# EAGLE board Radio Console (EAGLE 7.2.0)
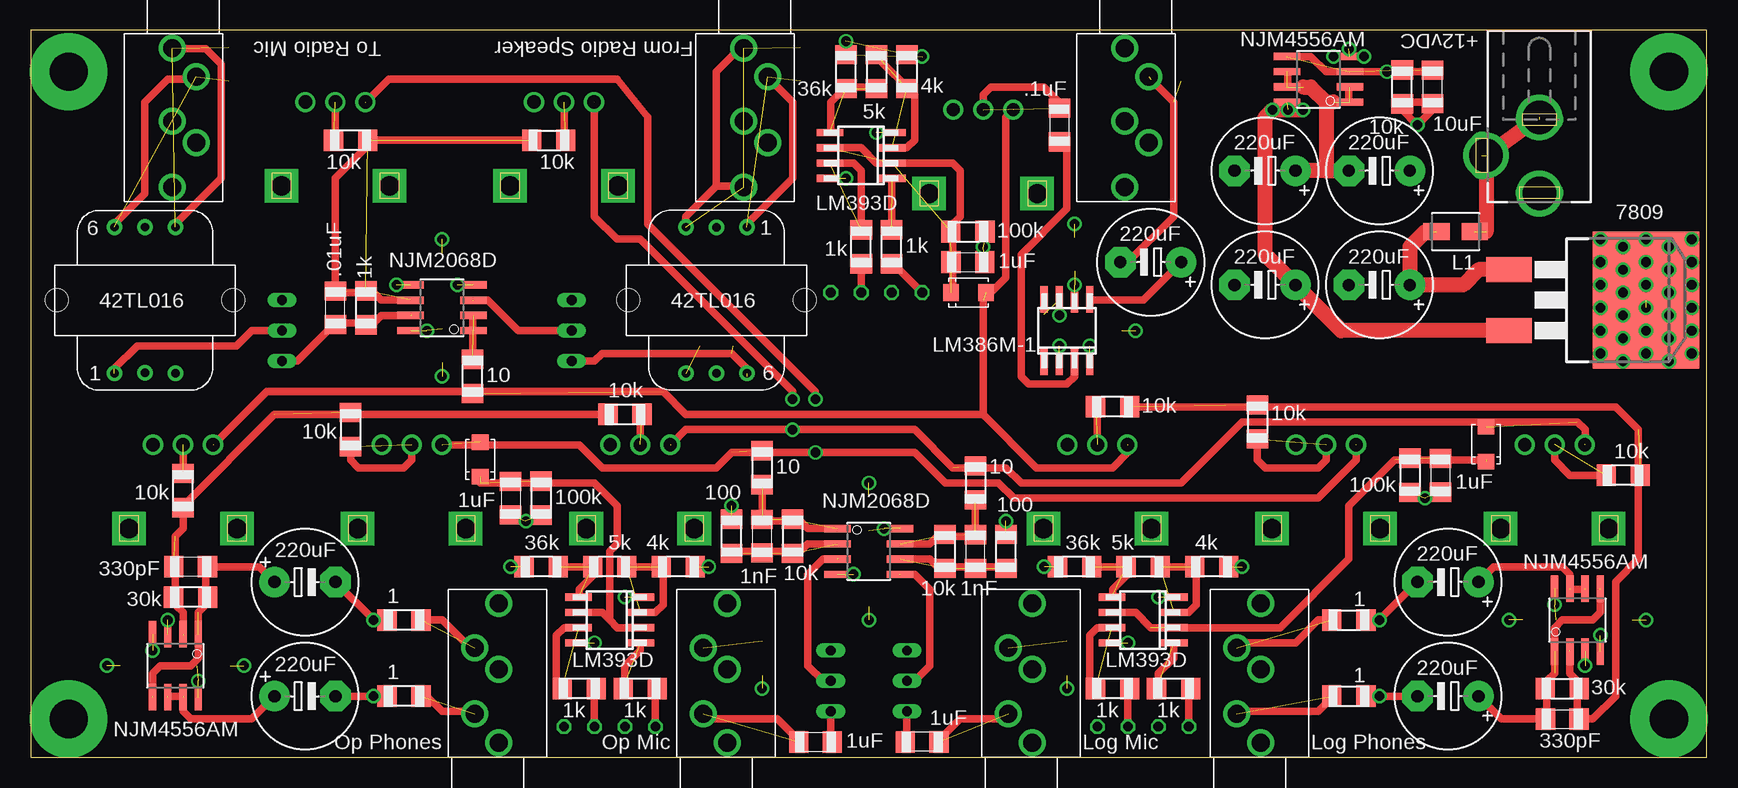
[diagram p0: board, top side]
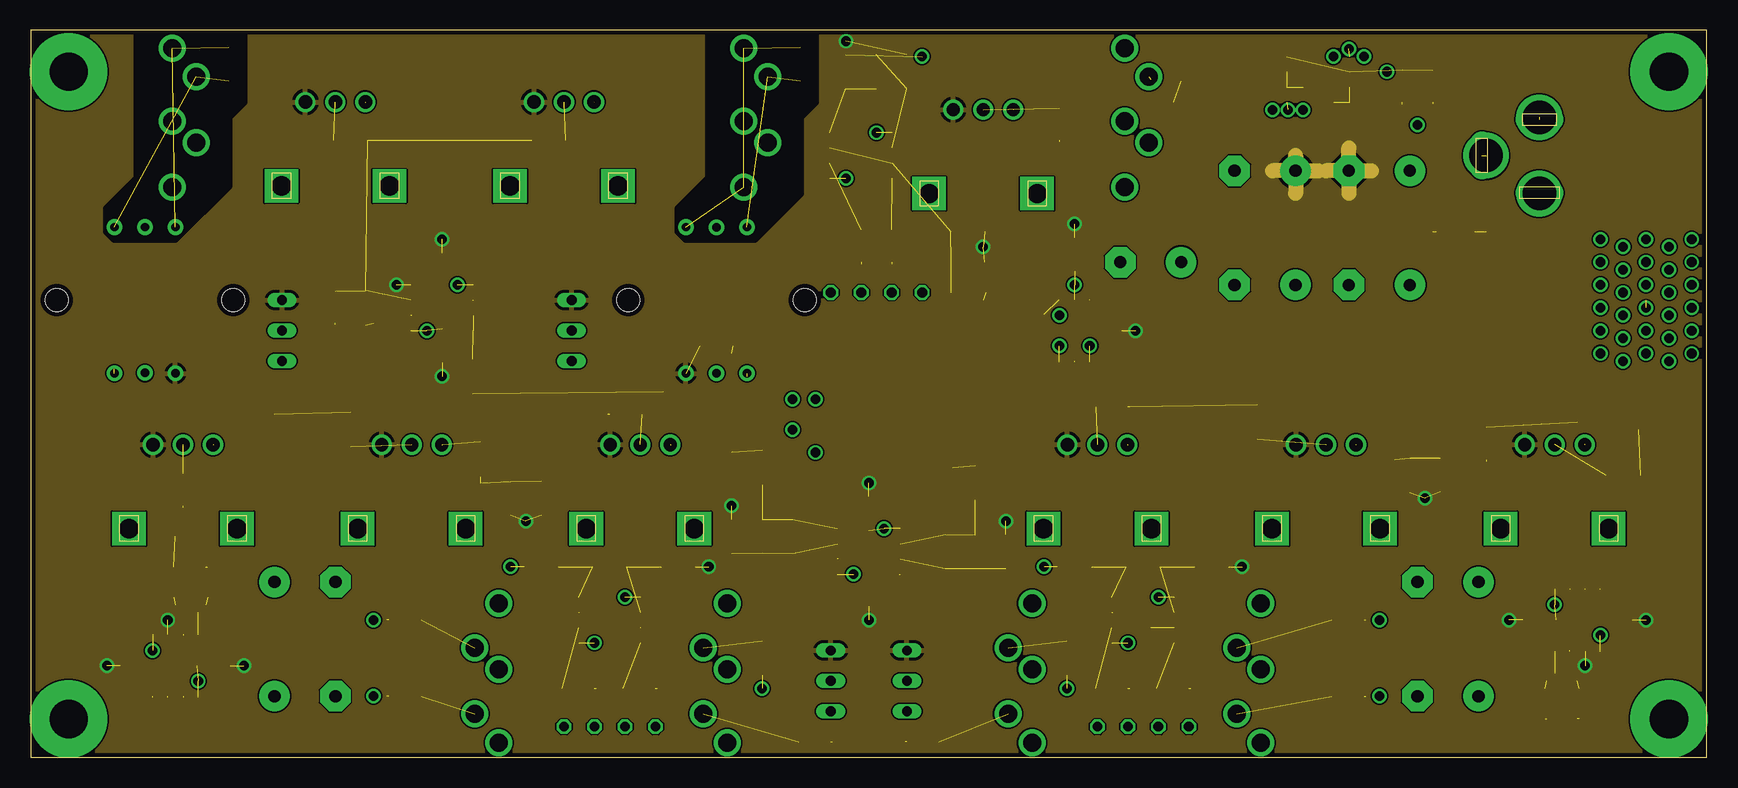
[diagram p1: board, inner layer VCC/2]
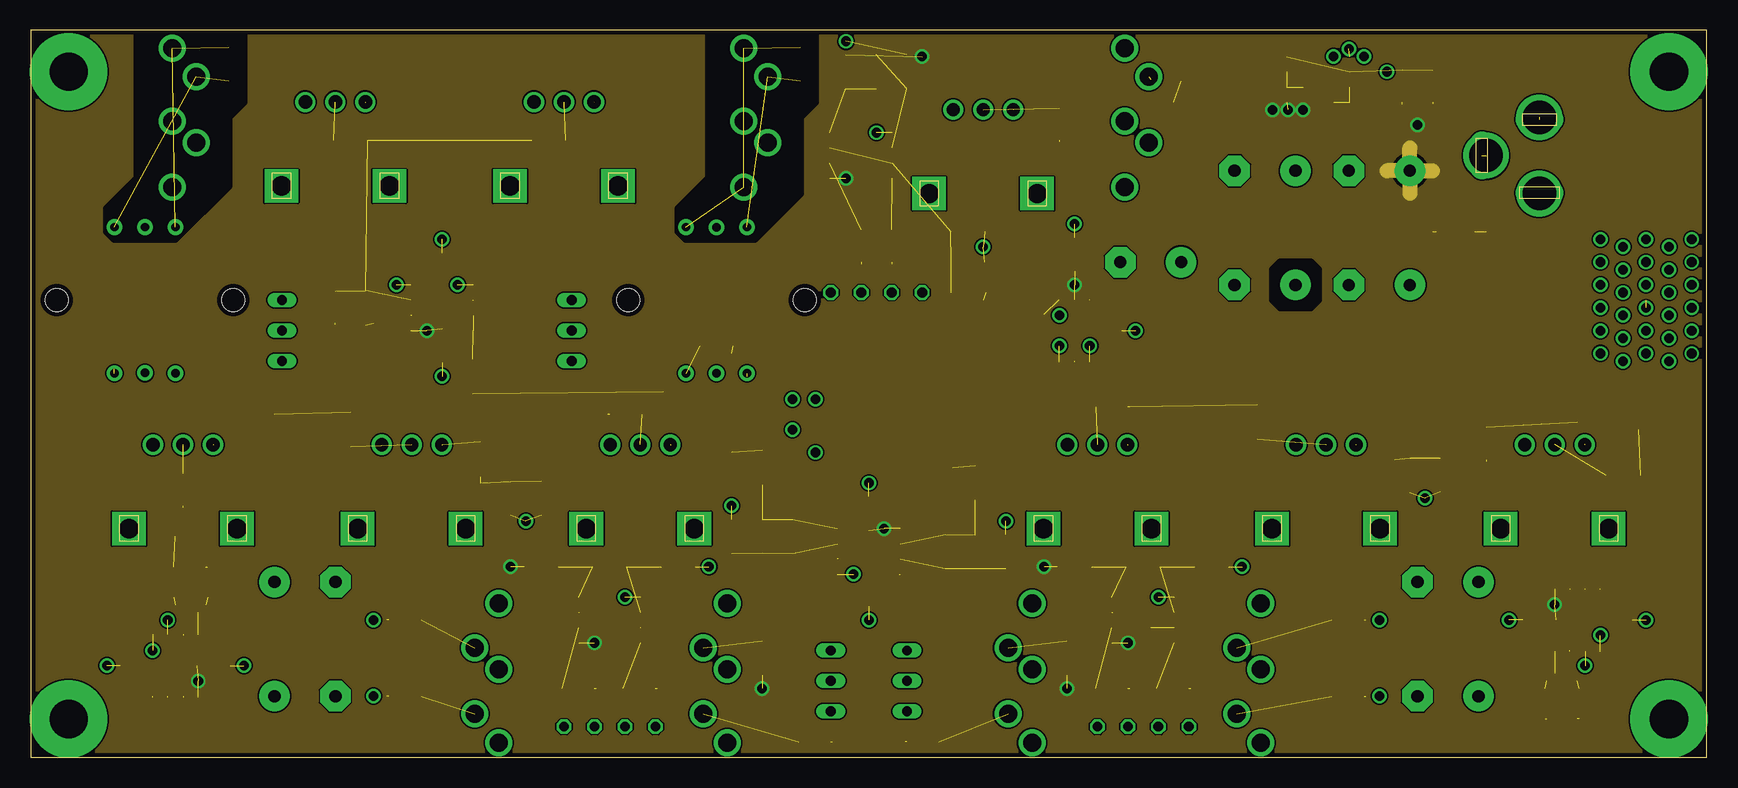
[diagram p2: board, inner layer VCC]
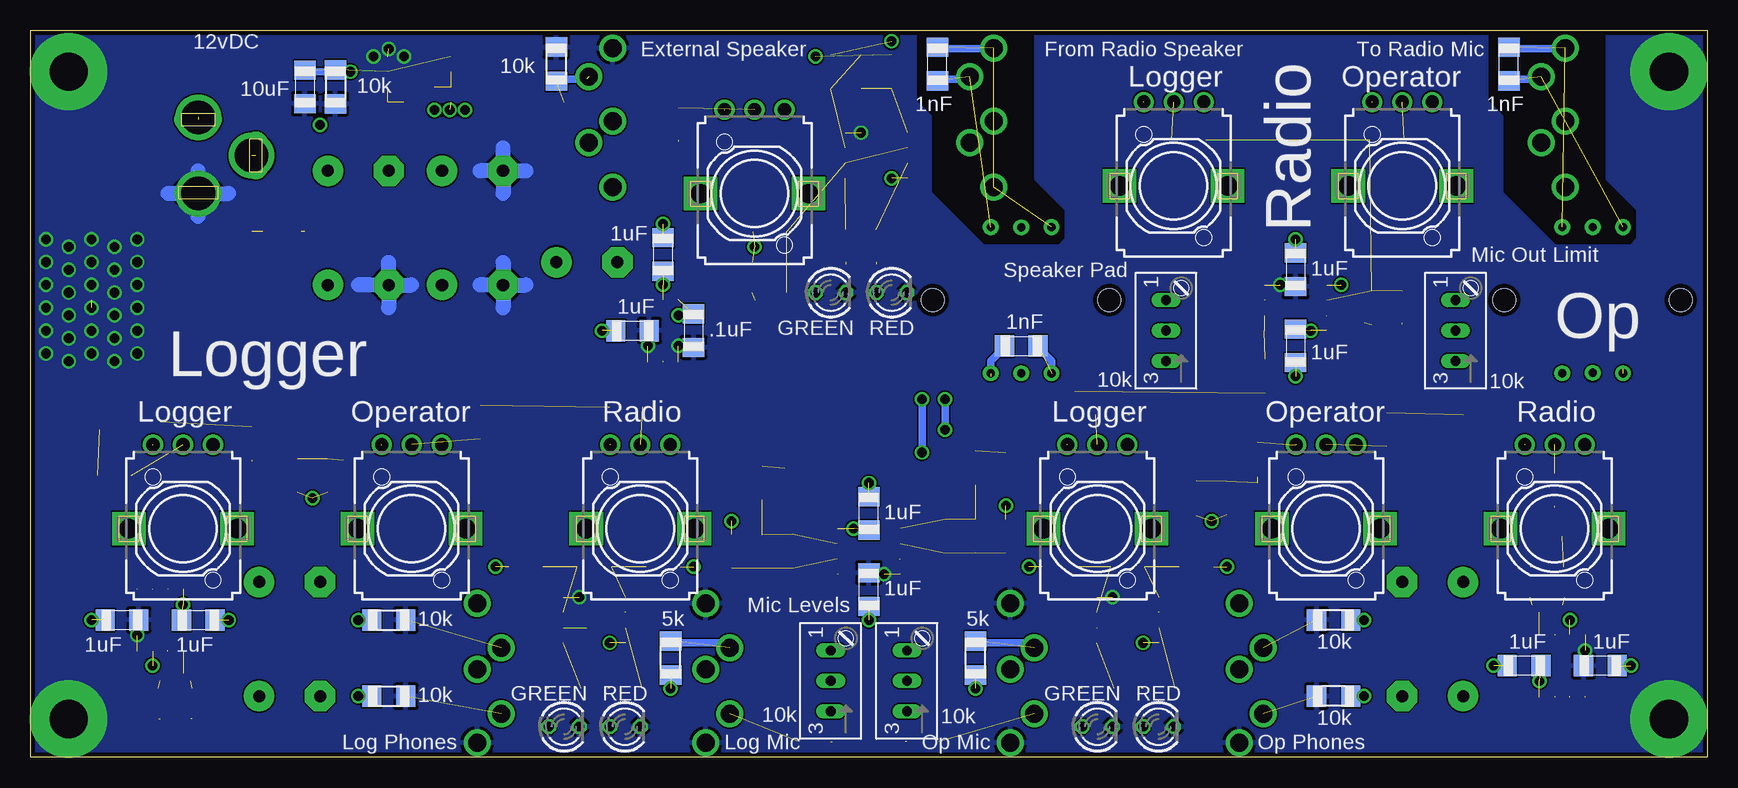
[diagram p3: board, bottom side, seen from below]

Size 139.68 x 60.63 mm. Coordinates in mm from the lower left corner, seen from the top.
Outline: 0,0 139.68,0 139.68,60.63 0,60.63 0,0
Copper layers (1*2*15*16): Top 0.035559375mm / dielectric 0.17018125mm / VCC/2 0.01778125mm / dielectric 47mil / VCC 0.01778125mm / dielectric 0.17018125mm / Bottom 0.035559375mm
Design rules "OSHPark-4layer": minimum track width 5mil, minimum drill 10mil, track to track 5mil, track to pad 5mil, pad to pad 5mil, via to via 5mil, smd to smd 5mil, copper to edge 15mil, drill to drill 6mil, minimum pad ring 4mil, minimum via ring 4mil, stop-mask expansion 4mil, vias tented up to drill 0mil, thermal gap 10mil

## Footprints (pad centres in the part's own frame; a part is rotated, then mirrored left to right if it is on the bottom)
C1206 = smd 1.6 x 1.8: 1 -1.4,0; 2 1.4,0
E5-8,5 = drill 1.016 pad 2.54: + -2.54,0 | drill 1.016 pad 2.54 octagon: - 2.54,0
SO08 = smd 0.61 x 2.21: 1 -1.905,-2.616; 2 -0.635,-2.616; 3 0.635,-2.616; 4 1.905,-2.616; 5 1.905,2.616; 6 0.635,2.616; 7 -0.635,2.616; 8 -1.905,2.616
SO08' = smd 0.6 x 2.2: 1 -1.905,-2.6; 2 -0.635,-2.6; 3 0.635,-2.6; 4 1.905,-2.6; 5 1.905,2.6; 6 0.635,2.6; 7 -0.635,2.6; 8 -1.905,2.6
SJ1-353 = drill 1.5: P$1 1.2,-0.9; P$2 3.6,1.1; P$3 9.1,1.1; P$4 12.8,-0.9; P$5 7.3,-0.9
DCJ0303 = drill 1 pad 2 long: 1 0,3.1; 2 4.8,0; 3 0,-3
L4035M = smd 2.2 x 1.4: 1 -1.6,0; 2 1.6,0
LED3MM = drill 0.813 octagon: A -1.27,0; K 1.27,0
R1206 = smd 1.6 x 1.803: 1 -1.422,0; 2 1.422,0
S64W = drill 0.813 long: A 2.54,1.27; E -2.54,1.27; S 0,1.27
EVUFXM = drill 1.1 pad 1.676: 1 -2.5,-7; 2 0,-7; 3 2.5,-7 | drill 1.6 pad 2.8 square: M1 4.5,0; M2 -4.5,0
42TL = drill 0.7 pad 1.3: 1 -2.54,-6.096; 2 0,-6.068; 3 2.54,-6.096; 4 2.54,6.096; 5 0,6.096; 6 -2.54,6.096 | hole 1.9: -7.353,0; 7.353,0
D2PACK = smd 2.083 x 3.81: 1 -2.54,-8.89; 3 2.54,-8.89 | smd 11.43 x 8.89: 2 0,2.54
DO-219AB = smd 1.3 x 1.4: ANODE -1.5,0; CATHODE 1.4,0

## Placement (x,y rotation side)
C1  1uF  [C1206]  74.3,1.27 180 top
C2  1nF  [C1206]  57.15,34.29 0 bottom
C3  1nF  [C1206]  78.74,17.14 90 top
C4  220uF  [E5-8,5]  118.11,5.08 180 top
C5  220uF  [E5-8,5]  118.11,14.61 180 top
C6  330pF  [C1206]  127.64,3.17 0 top
C7  .01uF  [C1206]  25.4,37.47 90 top
C8  220uF  [E5-8,5]  112.39,39.37 180 top
C9  10uF  [C1206]  116.84,55.88 90 top
C10  10uF  [C1206]  116.84,55.88 270 bottom
C11  220uF  [E5-8,5]  102.87,39.37 180 top
C12  1uF  [C1206]  34.29,34.29 270 bottom
C13  1uF  [C1206]  34.29,40.64 270 bottom
C14  1uF  [C1206]  15.24,7.62 180 bottom
C15  1uF  [C1206]  8.89,7.62 180 bottom
C16  1uF  [C1206]  69.85,20.32 90 bottom
C17  220uF  [E5-8,5]  22.86,14.61 0 top
C18  220uF  [E5-8,5]  22.86,5.08 0 top
C19  330pF  [C1206]  13.34,15.88 180 top
C20  1uF  [C1206]  65.41,1.27 0 top
C21  1uF  [C1206]  69.85,13.97 90 bottom
C22  1uF  [C1206]  125.73,11.43 0 bottom
C23  1uF  [C1206]  132.08,11.43 0 bottom
C24  1nF  [C1206]  60.96,18.41 90 top
C25  220uF  [E5-8,5]  102.87,48.9 180 top
C26  220uF  [E5-8,5]  112.39,48.9 180 top
C27  220uF  [E5-8,5]  93.34,41.27 180 top
C28  1uF  [C1206]  87,41.91 90 bottom
C29  .1uF  [C1206]  85.72,52.7 270 top
C30  1uF  [C1206]  89.53,35.56 0 bottom
C31  1nF  [C1206]  64.14,57.78 90 bottom
C32  1nF  [C1206]  16.51,57.78 90 bottom
C33  1uF  [C1206]  40.01,21.59 270 top
C34  1uF  [C1206]  78.11,41.27 0 top
C35  1uF  [C1206]  117.47,23.5 270 top
C36  .1uF  [C1206]  84.45,35.56 270 bottom
IC1  NJM4556AM  [SO08]  107.31,56.52 90 top
IC2  NJM4556AM  [SO08]  12.06,7.62 180 top
IC3  NJM4556AM  [SO08]  128.91,11.43 0 top
IC4  NJM2068D  [SO08]  69.85,17.14 270 top
IC5  NJM2068D  [SO08]  34.29,37.47 90 top
IC6  LM393D  [SO08']  48.26,11.43 90 top
IC7  LM393D  [SO08']  69.22,50.16 90 top
IC8  LM393D  [SO08']  92.71,11.43 90 top
IC10  LM386M-1  [SO08']  86.36,35.56 0 top
J1  Operator Headphones  [SJ1-353]  38.1,0 90 top
J2  Operator Microphone  [SJ1-353]  57.15,0 90 top
J3  To Radio MIcrophone  [SJ1-353]  12.7,60.33 270 top
J4  Logger Headphone  [SJ1-353]  101.6,0 90 top
J5  Logger Microphone  [SJ1-353]  82.55,0 90 top
J6  From Radio Speaker Out  [SJ1-353]  60.33,60.33 270 top
J7  [DCJ0303]  125.73,50.16 180 top
J8  Operator Headphones  [SJ1-353]  92.08,60.33 270 top
L1  [L4035M]  118.75,43.81 180 top
LED1  GREEN  [LED3MM]  50.8,2.54 0 bottom
LED2  RED  [LED3MM]  45.72,2.54 0 bottom
LED3  GREEN  [LED3MM]  73.03,38.73 0 bottom
LED4  RED  [LED3MM]  67.94,38.73 0 bottom
LED5  GREEN  [LED3MM]  95.25,2.54 0 bottom
LED6  RED  [LED3MM]  90.17,2.54 0 bottom
R1  5k  [R1206]  86.36,8.26 270 bottom
R2  10k  [S64W]  71.75,6.35 90 bottom
R3  10k  [R1206]  76.2,17.14 90 top
R4  100  [R1206]  81.28,17.14 270 top
R5  10  [R1206]  78.74,22.86 90 top
R6  EVU-F2AF30D14  [EVUFXM]  31.75,19.05 180 bottom
R7  10k  [R1206]  26.67,27.3 90 top
R8  EVU-F2AF30D14  [EVUFXM]  50.8,19.05 180 bottom
R9  10k  [R1206]  49.53,28.57 180 top
R10  EVU-F2AF30D14  [EVUFXM]  12.7,19.05 180 bottom
R11  10k  [R1206]  12.7,22.23 270 top
R12  1  [R1206]  31.11,11.43 0 top
R13  1  [R1206]  31.11,5.08 0 top
R14  30k  [R1206]  127.64,5.71 180 top
R15  10k  [R1206]  109.86,5.08 180 bottom
R16  10k  [R1206]  109.86,11.43 180 bottom
R17  EVU-F2AF30D14  [EVUFXM]  107.95,19.05 180 bottom
R18  10k  [R1206]  102.23,27.94 90 top
R19  EVU-F2AF30D14  [EVUFXM]  127,19.05 180 bottom
R20  10k  [R1206]  132.72,23.5 0 top
R21  EVU-F2AF30D14  [EVUFXM]  88.9,19.05 180 bottom
R22  10k  [R1206]  90.17,29.21 0 top
R23  1  [R1206]  109.86,5.08 180 top
R24  1  [R1206]  109.86,11.43 180 top
R25  30k  [R1206]  13.34,13.34 0 top
R26  10k  [R1206]  31.11,11.43 0 bottom
R27  10k  [R1206]  31.11,5.08 0 bottom
R28  5k  [R1206]  60.96,8.26 270 bottom
R29  10k  [S64W]  65.41,6.35 90 bottom
R30  10k  [R1206]  63.5,18.41 90 top
R31  100  [R1206]  58.42,18.41 270 top
R32  10k  [S64W]  43.81,35.56 90 bottom
R33  10  [R1206]  36.83,31.75 270 top
R34  10  [R1206]  60.96,24.13 90 top
R35  EVU-F2AF30D14  [EVUFXM]  25.4,47.62 180 bottom
R36  10k  [R1206]  26.67,51.44 0 top
R37  EVU-F2AF30D14  [EVUFXM]  44.45,47.62 180 bottom
R38  10k  [R1206]  43.18,51.44 180 top
R39  1k  [R1206]  27.94,37.47 270 top
R40  10k  [S64W]  19.68,35.56 90 bottom
R41  10k  [R1206]  114.3,55.88 270 top
R42  10k  [R1206]  114.3,55.88 90 bottom
R44  10k  [R1206]  95.89,57.78 270 bottom
R48  4k  [R1206]  53.98,15.88 0 top
R49  5k  [R1206]  48.26,15.88 0 top
R50  EVU-F2AF30D14  [EVUFXM]  79.38,46.99 180 bottom
R51  36k  [R1206]  42.55,15.88 0 top
R53  100k  [R1206]  42.55,21.59 90 top
R54  1k  [R1206]  50.8,5.71 0 top
R55  1k  [R1206]  45.72,5.71 0 top
R56  4k  [R1206]  73.03,57.15 90 top
R57  5k  [R1206]  70.48,57.15 90 top
R58  36k  [R1206]  67.94,57.15 270 top
R59  100k  [R1206]  78.11,43.81 180 top
R60  1k  [R1206]  71.75,42.55 270 top
R61  1k  [R1206]  69.22,42.55 270 top
R62  4k  [R1206]  98.42,15.88 0 top
R63  5k  [R1206]  92.71,15.88 0 top
R64  36k  [R1206]  87,15.88 0 top
R65  100k  [R1206]  114.94,23.5 90 top
R66  1k  [R1206]  95.25,5.71 0 top
R67  1k  [R1206]  90.17,5.71 0 top
TR1  42TL016  [42TL]  57.15,38.1 180 top
TR2  42TL016  [42TL]  9.53,38.1 0 top
U1  7809  [D2PACK]  132.08,38.1 270 top
U$1  RS07  [DO-219AB]  37.47,24.77 270 top
U$2  RS07  [DO-219AB]  78.11,38.73 180 top
U$3  RS07  [DO-219AB]  121.28,26.04 270 top

## Library data of the parts
C1-C36 L1 R1 R3-R5 R7 R9 R11-R16 R18 R20 R22-R28 R30 R31 R33 R34 R36 R38 R39 R41 R42 R44 R48 R49 R51 R53-R67 = resistor
IC1-IC5 = burr-brown; MF: TEXAS INSTRUMENT CONNECTORS; MPN: OPA2131UJ/2K5; OC_FARNELL: 1575488; OC_NEWARK: 75C4620
IC6-IC8 IC10 = linear
J1-J6 J8 = con-cui
J7 = con-jack; OC_FARNELL: unknown; OC_NEWARK: unknown
LED1-LED6 = led
R2 R6 R8 R10 R17 R19 R21 R29 R32 R35 R37 R40 R50 = pot
TR1 TR2 = trafo-xicon; OC_FARNELL: unknown; OC_NEWARK: unknown
U1 = v-reg
U$1-U$3 = diode

## Nets
GND: C8.- C10.2 C11.- C13.2 C15.2 C21.2 C23.2 C25.- C30.2 C36.2 IC1.4 IC2.4 IC3.4 IC4.4 IC5.4 IC6.4 IC7.4 IC8.4 IC10.2 IC10.4 J1.P$1 J2.P$1 J2.P$4 J4.P$1 J5.P$1 J5.P$4 J7.1 J8.P$1 LED1.K LED2.K LED3.K LED4.K LED5.K LED6.K R15.1 R16.1 R26.1 R27.1 R42.1 R44.1 U1.2
LOG-LOUT: J4.P$2 R23.2
LOG-MICRING: J5.P$3 R1.1
LOG-MICTIP: C1.1 J5.P$2
LOG-ROUT: J4.P$3 R24.2
LOGBUS: R5.2 R8.3 R19.3 R37.3 U$3.ANODE
N$1: C1.2 R2.E
N$2: IC4.5 R2.S
N$3: C3.1 IC4.6 R3.1 R4.2
N$4: C3.2 IC4.7 R3.2 R5.1
N$5: C2.1 R32.E TR1.6
N$6: R6.2 R7.1
N$7: R8.2 R9.1
N$8: R10.2 R11.1
N$9: C17.- R12.1 R26.2
N$10: C18.- R13.1 R27.2
N$11: C6.2 IC3.2 R14.1 R18.2 R20.2 R22.2
N$13: C19.2 IC2.2 R7.2 R9.2 R11.2 R25.1
N$15: R17.2 R18.1
N$16: R19.2 R20.1
N$17: C20.2 R29.E
N$18: R21.2 R22.1
N$19: C4.- R15.2 R23.1
N$20: C5.- R16.2 R24.1
N$21: IC5.3 R32.S
N$22: IC5.1 IC5.2 R33.1
N$23: C7.2 IC5.6 R36.2 R38.2 R39.1
N$24: R35.2 R36.1
N$25: R37.2 R38.1
N$29: C24.1 IC4.2 R30.1 R31.2
N$30: C24.2 IC4.1 R30.2 R34.1
N$34: C9.2 C10.1 IC1.3 IC1.5 R41.1 R42.2
N$38: C29.2 IC10.3
N$40: C36.1 IC10.7
N$41: C29.1 R50.2
N$42: C8.+ L1.2 U1.1
N$45: C4.+ C6.1 IC3.1 IC3.5 R14.2
N$46: C17.+ C19.1 IC2.1 IC2.5 R25.2
N$48: C18.+ IC2.6 IC2.7
N$52: C5.+ IC3.6 IC3.7
N$62: IC4.3 R29.S
N$67: C27.+ IC10.5
N$73: R40.S TR2.1
N$81: C7.1 IC5.7 R39.2 R40.E
N$96: IC6.3 R48.1 R49.2
N$97: IC6.5 R49.1 R51.2
N$98: C33.1 IC6.2 IC6.6 R53.2 U$1.CATHODE
N$99: IC6.1 R54.1
N$100: IC6.7 R55.1
N$101: LED1.A R54.2
N$102: LED2.A R55.2
N$103: IC7.3 R56.1 R57.2
N$104: IC7.5 R57.1 R58.2
N$105: C34.1 IC7.2 IC7.6 R59.2 U$2.CATHODE
N$106: IC7.1 R60.1
N$107: IC7.7 R61.1
N$108: LED3.A R60.2
N$109: LED4.A R61.2
N$110: IC8.3 R62.1 R63.2
N$111: IC8.5 R63.1 R64.2
N$112: C35.1 IC8.2 IC8.6 R65.2 U$3.CATHODE
N$113: IC8.1 R66.1
N$114: IC8.7 R67.1
N$115: LED5.A R66.2
N$116: LED6.A R67.2
OP-LOUT: J1.P$2 R13.2
OP-MICRING: J2.P$3 R28.1
OP-MICTIP: C20.1 J2.P$2
OP-ROUT: J1.P$3 R12.2
OPBUS: R6.3 R17.3 R34.2 R35.3 U$1.ANODE
RADBUS: R10.3 R21.3 R33.2 R50.3 U$2.ANODE
RADIN+: C31.1 J6.P$2 TR1.1
RADIN-: C31.2 J6.P$1 J6.P$4 TR1.3
RADMIC+: C32.1 J3.P$2 TR2.6
RADMIC-: C32.2 J3.P$1 TR2.4
SPK-OUT: C27.- J8.P$2 R44.2
VCC: C9.1 C11.+ C12.1 C14.1 C16.1 C22.1 C26.+ C28.1 IC1.8 IC2.8 IC3.8 IC4.8 IC5.8 IC6.8 IC7.8 IC8.8 IC10.6 R1.2 R28.2 R41.2 R51.1 R58.1 R64.1 U1.3
VCC/2: C2.2 C12.2 C13.1 C14.2 C15.1 C16.2 C21.1 C22.2 C23.1 C25.+ C26.- C28.2 C30.1 C33.2 C34.2 C35.2 IC1.1 IC1.2 IC1.6 IC1.7 IC2.3 IC3.3 IC5.5 R2.A R4.1 R6.1 R8.1 R10.1 R17.1 R19.1 R21.1 R29.A R31.1 R32.A R35.1 R37.1 R40.A R48.2 R50.1 R53.1 R56.2 R59.1 R62.2 R65.1 TR1.4 TR2.3
VIN: J7.2 J7.3 L1.1

## Tracks (layer width: path | path; a pad name or v marks a point on that pad's centre or on a via)
GND  (via drill 0.8, 2.8, 3.2 pad 6.45)  (11 unrouted)
  Bottom 1.27: 100.33,41.27 C11.- | C11.- 100.33,37.47 | C11.- 102.23,39.37 | C11.- 98.42,39.37 | C8.- 109.86,41.27 | C8.- 107.95,39.37 | C8.- 109.86,37.47 | C8.- 112.39,39.37 | 125.73,45.09 v125.73,46.99 | v125.73,46.99 125.73,48.9 | v125.73,46.99 123.19,46.99 | v125.73,46.99 128.27,46.99 | C25.- 100.33,50.8 | C25.- 100.33,46.99 | C25.- 98.42,48.9 | C25.- 102.23,48.9
  other vias: 136.53,57.15 136.53,3.17 3.17,3.17 3.17,57.15 10.16,8.89 130.81,10.16 68.58,15.24 108.58,58.42 111.12,58.42 138.43,43.18 138.43,41.27 138.43,39.37 138.43,37.47 138.43,35.56 138.43,33.66 136.53,42.55 136.53,40.64 136.53,38.73 136.53,36.83 136.53,34.92 136.53,33.02 134.62,33.66 134.62,35.56 134.62,37.47 134.62,39.37 134.62,41.27 134.62,43.18 132.72,42.55 132.72,40.64 132.72,38.73 132.72,36.83 132.72,34.92 132.72,33.02 130.81,33.66 130.81,35.56 130.81,37.47 130.81,39.37 130.81,41.27 130.81,43.18 35.56,39.37 88.27,34.29 109.86,59.05 49.53,13.34 93.98,13.34 70.48,52.07 85.72,34.29
  pour Bottom: 0,60.33 8.26,60.33 8.26,48.26 5.71,45.72 5.71,43.18 6.35,42.55 12.7,42.55 17.14,46.99 17.14,53.34 18.41,54.61 18.41,60.33 55.88,60.33 55.88,48.26 53.34,45.72 53.34,43.18 53.98,42.55 60.33,42.55 64.77,46.99 64.77,53.34 66.04,54.61 66.04,60.33 139.7,60.33 139.7,0 0,0
LOG-LOUT  (1 unrouted)
LOG-MICRING  (1 unrouted)
LOG-MICTIP  (1 unrouted)
LOG-ROUT  (1 unrouted)
LOGBUS  (via drill 0.8)  (5 unrouted)
  Top 0.61: v63.5,29.84 63.5,30.48 50.8,43.18 48.9,43.18 46.99,45.09 46.99,54.61 | 53.34,26.04 54.61,27.3 v63.5,27.3 73.66,27.3 76.83,24.13 81.28,24.13 82.55,22.86 95.89,22.86 100.97,27.94 128.91,27.94 129.54,27.3 129.54,26.04
  Bottom 0.61: v63.5,27.3 v63.5,29.84
N$1  (1 unrouted)
  Top 0.61: R2.E 73.03,1.27
N$2  (1 unrouted)
  Top 0.61: 72.39,15.24 73.66,15.24 74.93,13.97 74.93,7.62 73.66,6.35 R2.S
N$3  (3 unrouted)
N$4  (3 unrouted)
N$5  (2 unrouted)
  Top 0.61: 59.69,31.75 59.69,32.38 58.42,33.66 47.62,33.66 46.99,33.02 R32.E
N$6  (1 unrouted)
N$7  (1 unrouted)
N$8  (1 unrouted)
N$9  (via drill 0.8)  (2 unrouted)
  Top 0.61: C17.- v28.57,11.43 29.84,11.43
N$10  (via drill 0.8)  (2 unrouted)
  Top 0.61: C18.- v28.57,5.08 29.84,5.08
N$11  (6 unrouted)
  Top 0.61: 91.44,29.21 132.08,29.21 133.99,27.3 133.99,16.51 132.08,14.61 132.08,5.08 130.18,3.17 128.91,3.17 128.91,6.35 128.27,6.99 128.27,8.89
N$12  (via drill 0.8)
  Top 0.61: 116.84,57.15 v113.03,57.15 107.95,57.15 106.68,58.42 104.78,58.42
  Bottom 0.61: v113.03,57.15 116.84,57.15
N$13  (6 unrouted)
  Top 0.61: 12.7,10.16 12.7,12.06 12.06,12.7 12.06,18.41 12.7,19.05 12.7,20.95 20.32,28.57 48.26,28.57
N$15  (1 unrouted)
N$16  (1 unrouted)
N$17  (1 unrouted)
  Top 0.61: R29.E 66.67,1.27
N$18  (1 unrouted)
N$19  (via drill 0.8)  (2 unrouted)
  Top 0.61: C4.- v112.39,5.08 111.12,5.08
N$20  (via drill 0.8)  (2 unrouted)
  Top 0.61: C5.- v112.39,11.43 111.12,11.43
N$21  (1 unrouted)
  Top 0.61: 36.83,38.1 38.1,38.1 40.64,35.56 R32.S
N$22  (2 unrouted)
N$23  (4 unrouted)
N$24  (1 unrouted)
N$25  (1 unrouted)
N$26
  Top 0.61: 12.7,23.5 12.7,26.04
N$27
  Top 0.61: 31.75,26.04 31.75,24.77 31.11,24.13 27.3,24.13 26.67,24.77 26.67,26.04
N$28
  Top 0.61: 109.86,54.61 109.86,55.88
N$29  (3 unrouted)
N$30  (3 unrouted)
N$32
  cutout VCC: 106.68,41.27 104.14,41.27 103.5,40.64 103.5,38.1 104.14,37.47 106.68,37.47 107.31,38.1 107.31,40.64
N$33
  Bottom 0.61: 95.89,56.52 93.34,56.52
N$34  (5 unrouted)
N$35
  Top 0.61: 104.78,55.88 104.78,57.15
N$38  (2 unrouted)
  Top 0.61: 85.72,51.44 86.36,50.8 86.36,45.72 82.55,41.91 82.55,31.75 83.19,31.11 86.36,31.11 87,31.75 87,33.02
N$40  (1 unrouted)
N$41  (1 unrouted)
N$42  (1 unrouted)
  Top 1.27: 116.84,43.81 116.2,43.81 114.94,42.55 C8.+ 119.38,39.37 120.65,40.64 U1.1 124.46,40.64
N$43
  cutout VCC: 8.89,60.33 8.89,48.26 6.35,45.72 6.35,43.81 6.99,43.18 12.06,43.18 16.51,47.62 16.51,53.34 17.78,54.61 17.78,60.33
N$45  (4 unrouted)
  Top 0.61: 130.81,13.97 130.81,12.06 130.18,11.43 127.64,11.43 127,10.79 127,6.99 126.36,6.35 126.36,3.17 122.56,3.17 C4.+
N$46  (4 unrouted)
  Top 0.61: 10.16,5.08 10.16,6.99 10.79,7.62 13.34,7.62 13.97,8.26 13.97,12.06 14.61,12.7 14.61,15.88 19.05,15.88 C17.+
N$47
  cutout VCC: 56.52,60.33 56.52,48.26 53.98,45.72 53.98,43.81 54.61,43.18 60.33,43.18 64.14,46.99 64.14,53.34 65.41,54.61 65.41,60.33
N$48  (2 unrouted)
  Top 0.61: 11.43,5.08 12.7,5.08 12.7,3.81 13.34,3.17 18.41,3.17 C18.+
N$49
  Top 0.61: 33.02,5.08 34.29,3.81 36.2,3.81
N$50
  Top 0.61: 32.38,11.43 34.29,11.43 36.83,8.89
N$52  (2 unrouted)
  Top 0.61: 129.54,13.97 128.27,13.97 128.27,15.24 127.64,15.88 121.92,15.88 C5.+
N$53
  Top 0.61: 108.58,5.08 107.31,3.81 100.33,3.81
N$54
  Top 0.61: 108.58,11.43 107.31,11.43 105.41,9.53 100.33,9.53
N$55
  cutout VCC/2: 8.89,60.33 8.89,48.26 6.35,45.72 6.35,43.81 6.99,43.18 12.06,43.18 16.51,47.62 16.51,53.34 17.78,54.61 17.78,60.33
N$56
  cutout VCC/2: 56.52,60.33 56.52,48.26 53.98,45.72 53.98,43.81 54.61,43.18 60.33,43.18 64.14,46.99 64.14,53.34 65.41,54.61 65.41,60.33
N$58
  Bottom 0.61: 60.96,9.53 56.52,9.53
N$59
  Bottom 0.61: 81.28,9.53 86.36,9.53
N$60
  Top 0.61: 56.52,3.17 62.23,3.17 64.14,1.27
N$61
  Top 0.61: 75.56,1.27 77.47,3.17 81.28,3.17
N$62  (1 unrouted)
  Top 0.61: 67.31,16.51 66.04,16.51 64.77,15.24 64.77,7.62 66.04,6.35 R29.S
N$63
  Top 0.61: 67.31,17.78 64.77,17.78 64.14,17.14 58.42,17.14
N$64
  Top 0.61: 67.31,19.05 64.77,19.05 64.14,19.68 60.96,19.68 60.96,22.86
N$65
  Top 0.61: 72.39,17.78 74.93,17.78 75.56,18.41 78.74,18.41 78.74,21.59
N$66
  Top 0.61: 72.39,16.51 74.93,16.51 75.56,15.88 81.28,15.88
N$67  (1 unrouted)
  Top 0.61: 88.27,38.1 92.71,38.1 C27.+
N$69
  Top 0.61: 25.4,51.44 25.4,54.61
N$71
  Top 0.61: 50.8,28.57 50.8,26.04
N$73  (1 unrouted)
  Top 0.61: 6.99,32.38 8.89,34.29 17.14,34.29 18.41,35.56 R40.S
N$74
  Top 0.61: 12.06,59.05 14.61,59.05 15.88,57.78 15.88,48.26 12.06,44.45
N$75
  Top 0.61: 13.97,56.52 11.43,56.52 9.53,54.61 9.53,46.99 6.99,44.45
N$76
  Top 0.61: 61.59,56.52 63.5,54.61 63.5,48.26 59.69,44.45
N$77
  Top 0.61: 59.69,47.62 57.15,47.62 | 57.15,47.62 54.61,45.09 54.61,44.45 | 57.15,47.62 57.15,57.15 59.05,59.05
N$78
  Bottom 0.61: 54.61,31.75 54.61,33.02 55.88,34.29
N$79
  Bottom 0.61: 59.69,31.75 59.69,33.02 58.42,34.29
N$80
  Top 0.61: 31.75,38.1 29.21,38.1 28.57,38.73 25.4,38.73 25.4,48.26 27.94,50.8 27.94,51.44 41.91,51.44
N$81  (3 unrouted)
  Top 0.61: 31.75,36.83 29.21,36.83 28.57,36.2 25.4,36.2 22.23,33.02 R40.E
N$82
  Top 0.61: 36.83,36.83 36.83,33.02
N$83
  Bottom 0.61: 12.06,59.05 16.51,59.05
N$85
  Bottom 0.61: 13.97,56.52 16.51,56.52
N$86
  Bottom 0.61: 59.69,59.05 64.14,59.05
N$90
  Bottom 0.61: 61.59,56.52 64.14,56.52
N$91
  Top 0.61: 88.9,26.04 88.9,29.21
N$92
  Top 0.61: 107.95,26.04 107.95,24.77 107.31,24.13 102.87,24.13 102.23,24.77 102.23,26.67
N$94
  Top 0.61: 127,26.04 127,24.77 128.27,23.5 131.44,23.5
N$95
  Top 0.61: 44.45,51.44 44.45,54.61
N$96  (2 unrouted)
N$97  (2 unrouted)
N$98  (5 unrouted)
  Top 0.61: 37.47,22.86 46.99,22.86 48.9,20.95 48.9,17.78 48.26,17.14 48.26,11.43 | 50.8,10.79 48.9,10.79 48.26,11.43 | 48.26,11.43 47.62,12.06 45.72,12.06
N$99  (1 unrouted)
N$100  (1 unrouted)
N$101  (1 unrouted)
  Top 0.61: 52.07,5.71 LED1.A
N$102  (1 unrouted)
  Top 0.61: 46.99,5.71 LED2.A
N$103  (2 unrouted)
N$104  (2 unrouted)
N$105  (4 unrouted)
N$106  (1 unrouted)
N$107  (1 unrouted)
N$108  (1 unrouted)
  Top 0.61: LED3.A 71.75,41.27
N$109  (1 unrouted)
  Top 0.61: LED4.A 69.22,41.27
N$110  (2 unrouted)
N$111  (2 unrouted)
N$112  (5 unrouted)
  Top 0.61: 90.17,12.06 92.08,12.06 93.34,10.79 104.14,10.79 109.86,16.51 109.86,20.95 113.67,24.77 121.28,24.77
N$113  (1 unrouted)
N$114  (1 unrouted)
N$115  (1 unrouted)
  Top 0.61: LED5.A 96.52,5.71
N$116  (1 unrouted)
  Top 0.61: LED6.A 91.44,5.71
N$117
  Top 0.61: 70.48,55.88 67.94,55.88 66.67,54.61 66.67,52.07
N$118
  Top 0.61: 50.8,9.53 50.8,8.89 49.53,7.62 49.53,5.71
N$119
  Top 0.61: 45.72,10.79 44.45,10.79 43.81,10.16 43.81,5.71
N$120
  Top 0.61: 50.8,12.06 52.07,12.06 52.7,12.7 52.7,15.88 49.53,15.88
N$121
  Top 0.61: 88.27,15.88 91.44,15.88 91.44,15.24 90.17,13.97 90.17,13.34
N$122
  Top 0.61: 45.72,13.34 45.72,13.97 46.99,15.24 46.99,15.88 43.81,15.88
N$123
  Top 0.61: 90.17,10.79 88.9,10.79 88.27,10.16 88.27,6.35
N$124
  Top 0.61: 95.25,9.53 95.25,8.26 93.98,6.99 93.98,5.71
N$125
  Top 0.61: 95.25,12.06 96.52,12.06 97.16,12.7 97.16,15.88 93.98,15.88
N$126
  Top 0.61: 70.48,58.42 73.66,55.24 73.66,51.44 73.03,50.8 71.75,50.8
N$127
  Top 0.61: 66.67,50.8 69.22,50.8 70.48,49.53 76.83,49.53 77.47,48.9 77.47,45.09 76.83,44.45 76.83,38.73
N$129
  Top 0.61: 71.75,48.26 71.75,43.81
N$130
  Top 0.61: 66.67,49.53 68.58,49.53 69.22,48.9 69.22,43.81
N$132  (via drill 0.8)
  other vias: 85.72,36.83
N$135
  Top 0.61: 79.38,53.98 79.38,55.24 80.01,55.88 84.45,55.88 85.72,54.61
OP-LOUT  (1 unrouted)
OP-MICRING  (1 unrouted)
OP-MICTIP  (1 unrouted)
OP-ROUT  (1 unrouted)
OPBUS  (via drill 0.8)  (5 unrouted)
  Top 0.61: 34.29,26.04 45.72,26.04 47.62,24.13 57.15,24.13 58.42,25.4 v65.41,25.4 73.66,25.4 76.2,22.86 80.64,22.86 81.92,21.59 107.31,21.59 110.49,24.77 110.49,26.04 | v65.41,29.84 65.41,30.48 51.44,44.45 51.44,53.34 48.9,56.52 29.84,56.52 27.94,54.61
  Bottom 0.61: v65.41,29.84 v65.41,25.4
RADBUS  (5 unrouted)
  Top 0.61: 15.24,26.04 19.68,30.48 52.7,30.48 54.61,28.57 79.38,28.57 | 79.38,28.57 79.38,38.1 81.28,40.01 81.28,53.34 81.92,53.98 | 79.38,28.57 83.82,24.13 90.17,24.13 91.44,25.4 91.44,26.04
RADIN+  (2 unrouted)
RADIN-  (3 unrouted)
RADMIC+  (2 unrouted)
RADMIC-  (2 unrouted)
SPK-OUT  (2 unrouted)
  Top 0.61: C27.- 91.44,41.27 95.25,45.09 95.25,54.61 93.34,56.52
VCC  (via drill 0.8)  (21 unrouted)
  Top 0.61: 114.3,54.61 116.84,54.61 116.84,53.98 v115.57,52.7 114.3,53.98 114.3,54.61
  Top 1.27: U1.3 109.22,35.56 C11.+ 102.87,41.91 102.87,53.34 v103.5,53.98 v106.05,53.98
  VCC 1.27: C26.+ 114.94,50.8 | C26.+ 114.94,46.99 | C26.+ 113.03,48.9 | C26.+ 116.84,48.9
  other vias: 13.97,6.35 127,12.7 60.96,5.71 86.36,5.71 71.12,19.05 33.02,35.56 87,39.37 104.78,53.98 46.99,9.53 40.01,15.88 84.45,15.88 91.44,9.53 67.94,48.26 74.3,58.42
  pour VCC: 0,0 0,60.33 139.7,60.33 139.7,0
VCC/2  (via drill 0.8)  (29 unrouted)
  Top 1.27: 106.05,55.88 106.68,55.88 107.95,54.61 | 107.95,54.61 108.58,54.61 | 107.95,54.61 107.95,48.9 | 107.95,48.9 C25.+ | 107.95,48.9 C26.-
  VCC/2 1.27: 105.41,50.16 C25.+ | C25.+ 105.41,46.99 | C25.+ 103.5,48.9 | C25.+ 107.31,48.9 | C26.- 109.86,50.8 | C26.- 109.86,46.99 | C26.- 107.95,48.9 | C26.- 111.76,48.9
  other vias: 17.78,7.62 6.35,7.62 11.43,11.43 123.19,11.43 134.62,11.43 129.54,7.62 69.85,22.86 69.85,11.43 58.42,20.95 81.28,19.68 34.29,43.18 34.29,31.75 30.48,39.37 92.08,35.56 87,44.45 56.52,15.88 41.27,19.68 116.2,21.59 100.97,15.88 79.38,42.55 67.94,59.69
  pour VCC/2: 0,60.33 139.7,60.33 139.7,0 0,0
VIN  (via drill 2.8)  (3 unrouted)
  Top 1.27: v125.73,53.34 v121.28,50.16 121.28,43.81

## Text on the board
tNames: To Radio Mic | From Radio Speaker | +12vDC | Op Phones | Op Mic | Log Mic | Log Phones
bNames: 12vDC | To Radio Mic | From Radio Speaker | External Speaker | Operator | Logger | Radio | Mic Out Limit | Speaker Pad | Op | Logger | Radio | Operator | Logger | Radio | Operator | Logger | Mic Levels | Op Mic | Log Phones | Op Phones | Log Mic